# Altium PCB Top.PcbDoc
Units mil, origin at the board's own origin, x right, y up, seen from the top; angles counter-clockwise.
Board outline 1480.27 x 1340.03 mil, 2 copper layers (Top Layer, Bottom Layer); 4 components, 0 nets, 4 pads, 0 vias.
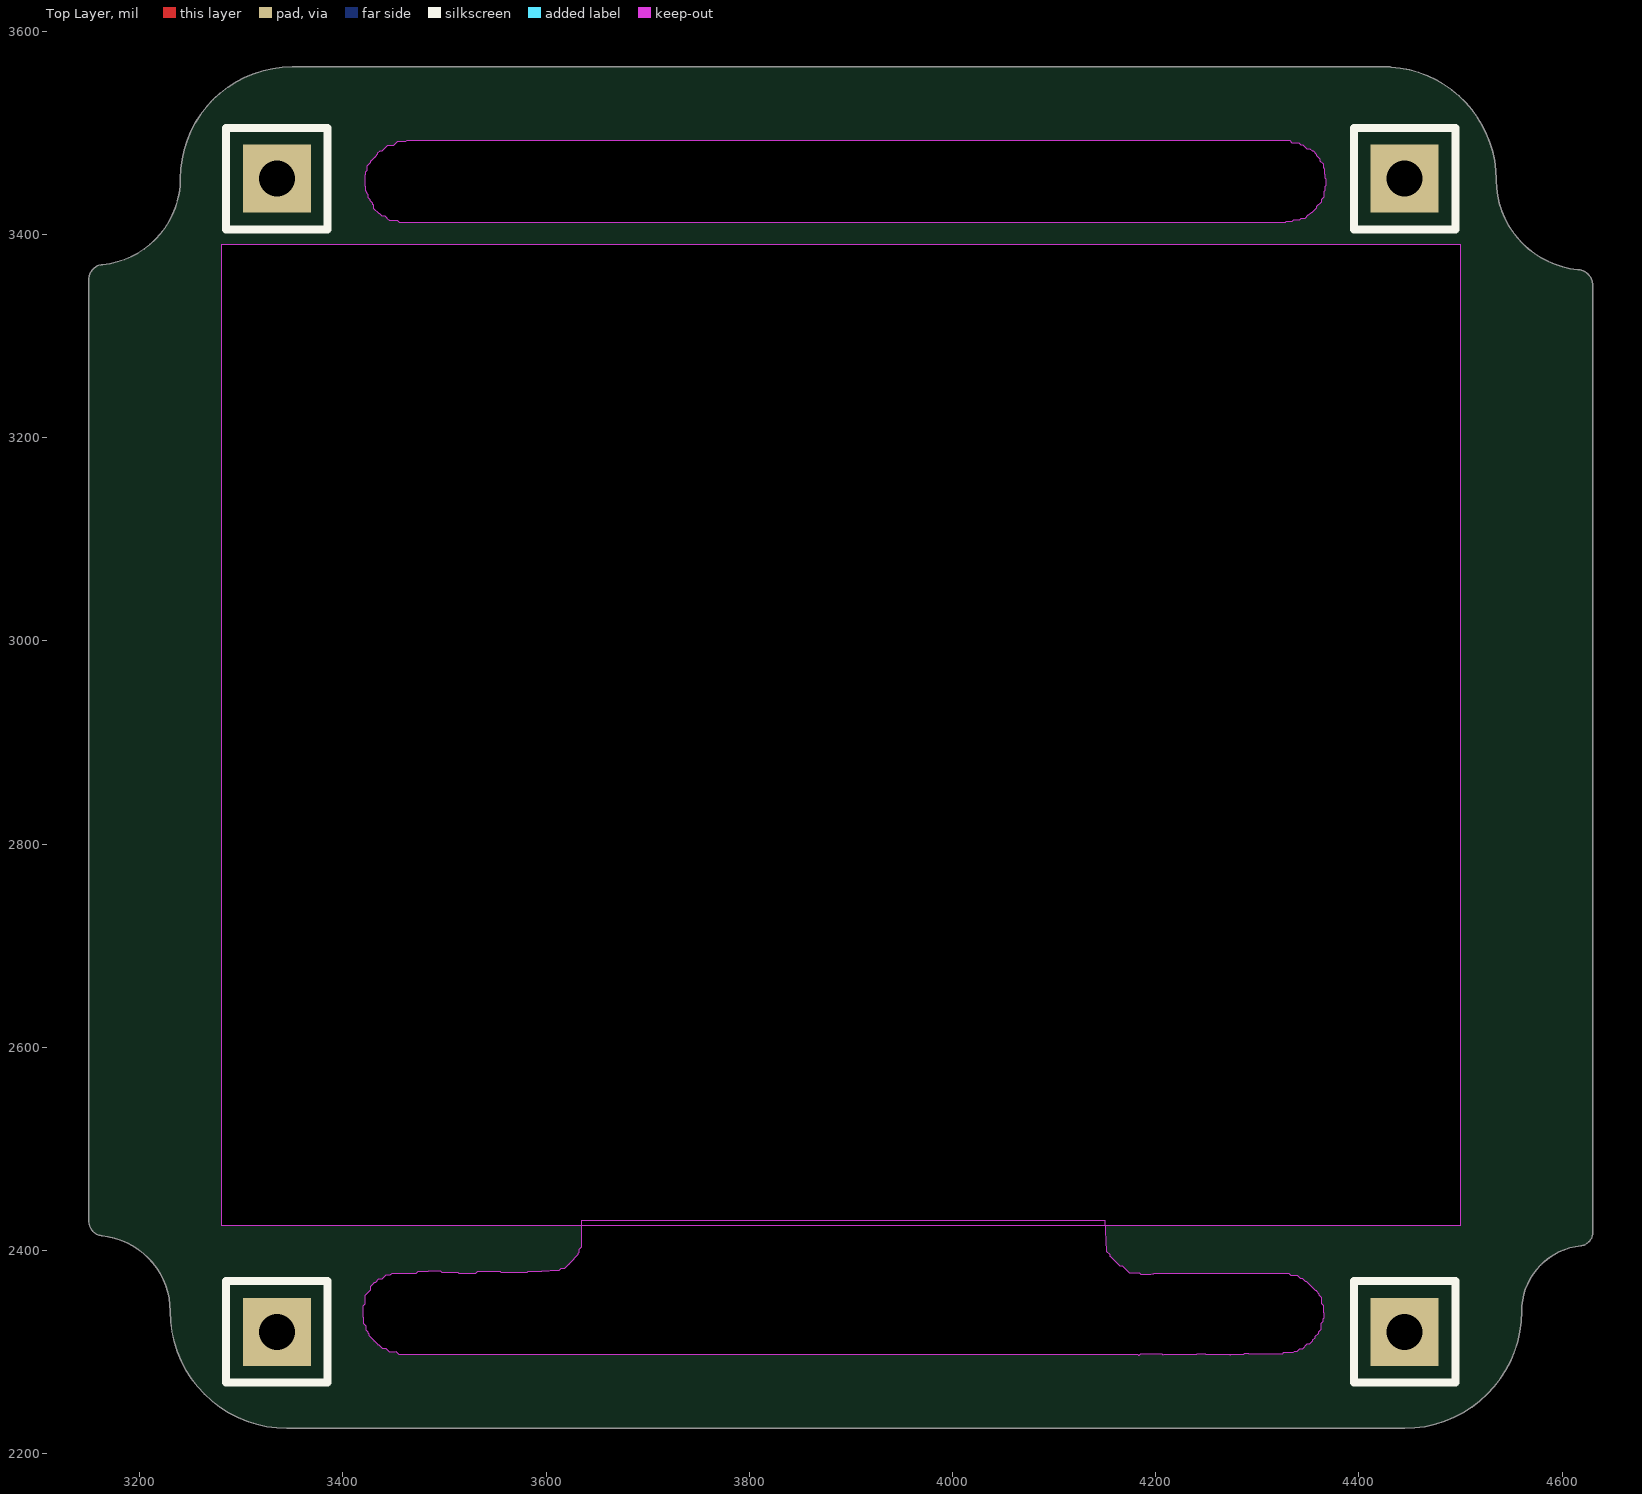
[diagram p0: Top Layer view]
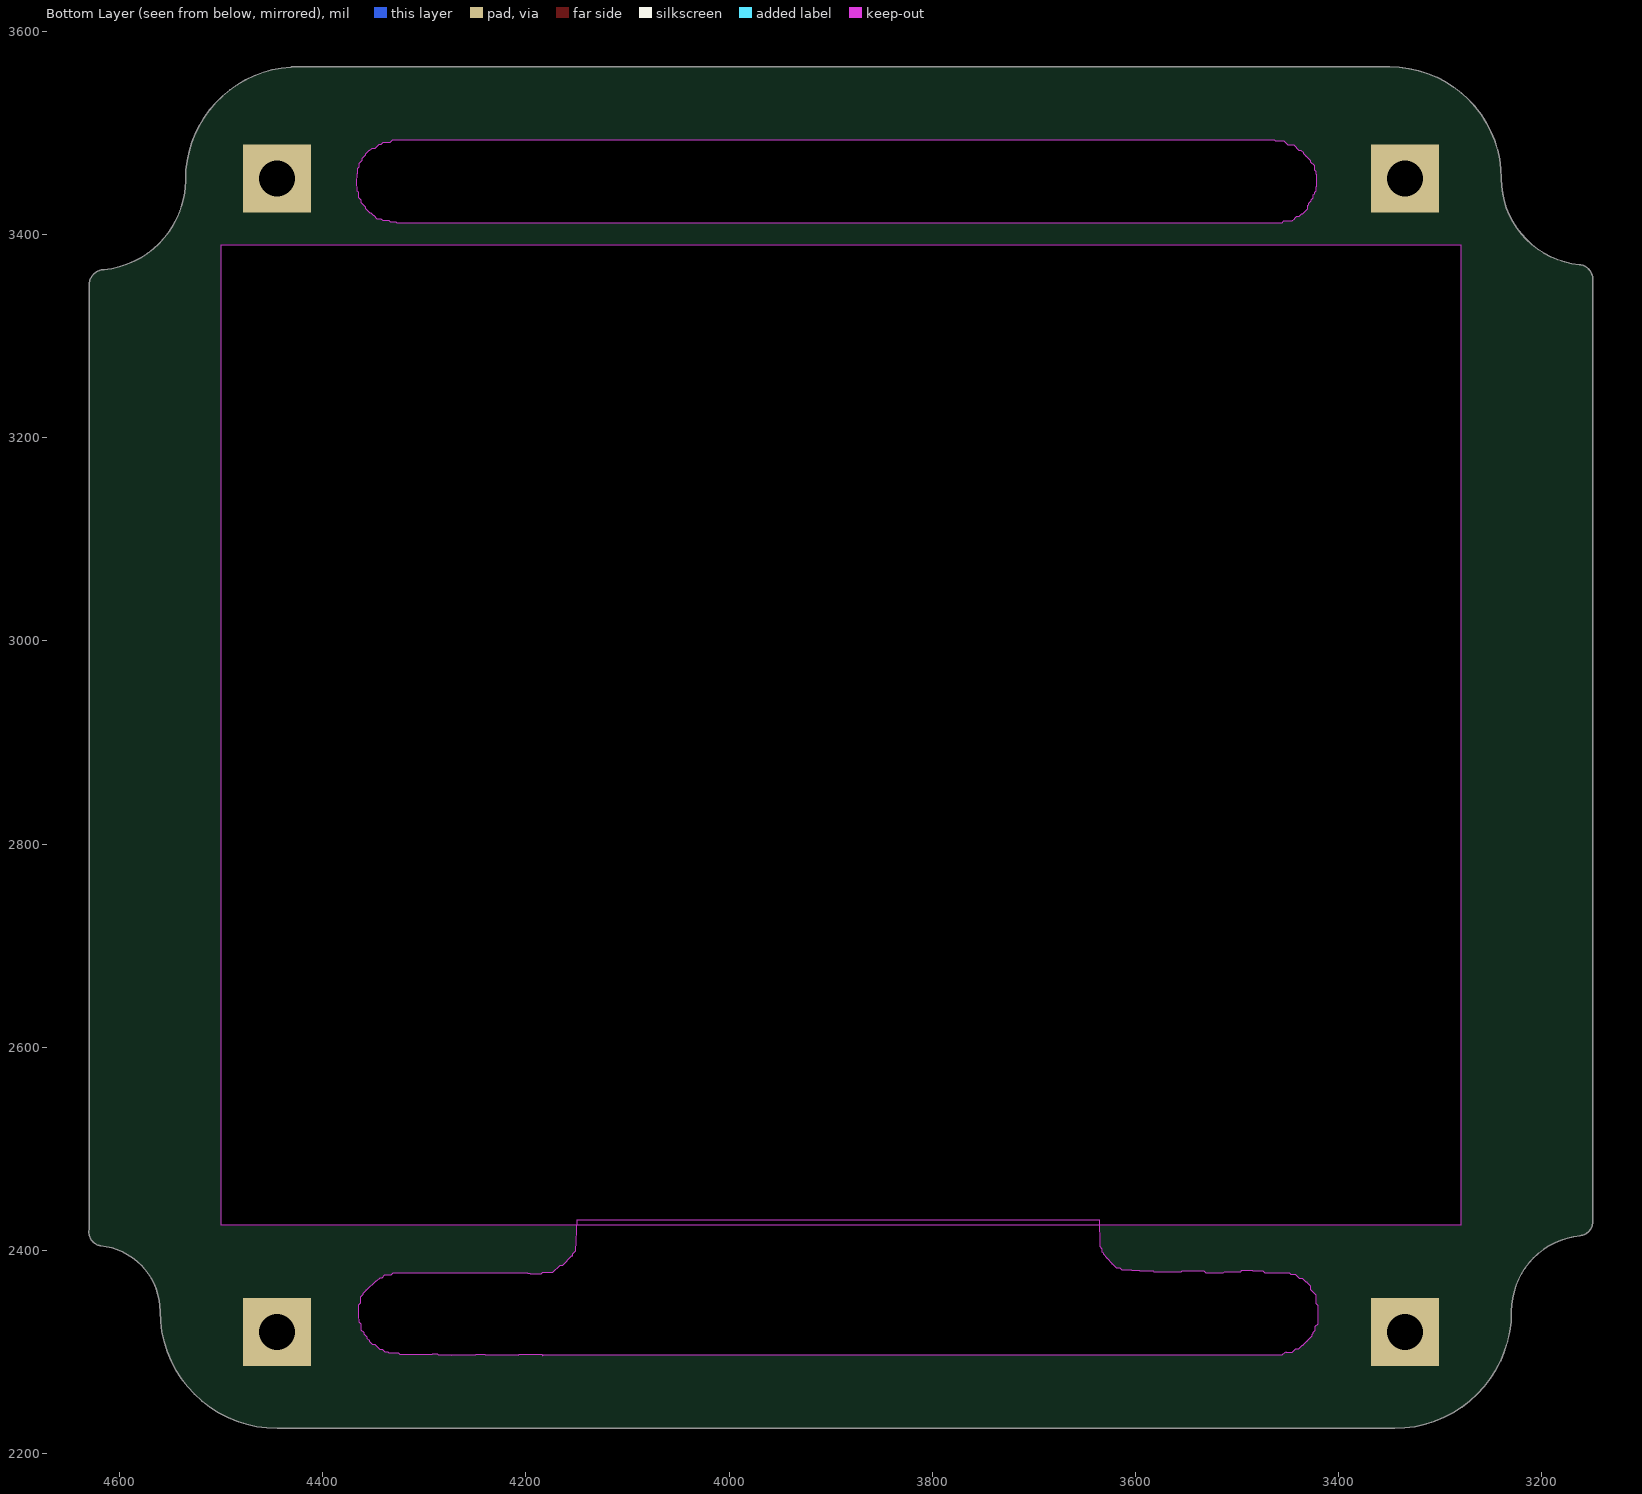
[diagram p1: Bottom Layer view, seen from below]

## Layer stack, top to bottom
Top Solder: solder mask 0.4, Solder Resist, Dk 3.5
Top Layer: signal copper 1.4
Dielectric 1: dielectric 12.6, FR-4, Dk 4.8
Bottom Layer: signal copper 1.4
Bottom Solder: solder mask 0.4, Solder Resist, Dk 3.5

## Board outline
3229.98,2340 cw(c3235,2340) 3229.99,2340.04 ccw(c3155,2340) 3162.42,2414.62 cw(c3162.84,2419.61) 3162.15,2414.65 cw(c3164.11,2428.73) 3149.99,2430.31 3149.99,3354.81 cw(c3164.63,3355.81) 3163.4,3370.43 ccw(c3155,3455) 3239.99,3455 cw(c3350,3455) 3350,3565.02 4430,3565.02 cw(c4430,3560) 4431.54,3564.77 cw(c4424.17,3454.17) 4535.02,3454.17 cw(c4424.17,3454.17) 4535.02,3453.34 ccw(c4624.17,3454.17) 4615.25,3365.46 cw(c4614.75,3350.2) 4630.02,3350.2 cw(c4614.75,3350.2) 4630.02,3349.96 cw(c4614.75,3350.2) 4630.01,3349.9 4630.02,3350 4630.02,2420.45 cw(c4616.4,2418.26) 4630.19,2418.26 cw(c4616.4,2418.26) 4619.13,2404.75 cw(c4618.14,2409.66) 4618.56,2404.66 cw(c4625,2340) 4618.63,2404.67 4618.56,2404.66 ccw(c4625,2340) 4560.02,2340 cw(c4445,2340) 4445,2224.98 3345,2224.98 cw(c3345,2230) 3344.92,2224.99 ccw(c3345,2340) 3345,2224.99 3344.92,2224.99 cw(c3345,2340)
cut-out: 3280,3390 3280,2425 4500,2425 4500,3390
cut-out: 3635,2430 4150,2430 4151.34,2399.41 4154.65,2396.1 4154.65,2394.13 4155.43,2394.13 4164.49,2385.08 4166.85,2385.08 4173.94,2377.99 4183.78,2377.99 4185.35,2376.42 4195.2,2376.42 4195.98,2377.2 4197.95,2377.2 4198.35,2377.6 4331.02,2377.6 4332.99,2375.63 4339.29,2375.63 4342.05,2372.87 4344.02,2372.87 4347.17,2369.72 4347.95,2369.72 4357.01,2360.67 4357.8,2360.67 4357.8,2360.28 4360.55,2357.52 4360.55,2356.34 4362.91,2353.98 4362.91,2348.07 4364.88,2346.1 4364.88,2339.02 4365.28,2338.62 4365.28,2333.11 4364.49,2332.32 4364.49,2329.96 4362.52,2327.99 4362.52,2322.09 4359.76,2319.33 4359.76,2318.15 4356.61,2315 4356.61,2313.82 4354.25,2311.46 4354.25,2310.67 4351.1,2307.52 4348.74,2307.52 4344.02,2302.8 4341.26,2302.8 4338.9,2300.43 4336.14,2300.43 4334.96,2299.25 4325.51,2299.25 4324.33,2298.07 4292.05,2298.07 4291.65,2298.46 4287.32,2298.46 4286.14,2297.28 4273.94,2297.28 4273.54,2296.89 4273.15,2297.28 4249.53,2297.28 4249.13,2297.68 4240.47,2297.68 4240.08,2297.28 4207.8,2297.28 4207.4,2296.89 4206.61,2297.68 4184.57,2297.68 4183.39,2296.5 4182.6,2297.28 3455.43,2297.28 3452.28,2300.43 3451.5,2299.65 3445.98,2299.65 3442.44,2303.19 3439.29,2303.19 3435.75,2306.73 3434.96,2306.73 3434.96,2307.13 3431.42,2310.67 3431.02,2310.67 3431.02,2311.06 3425.91,2316.18 3425.91,2317.76 3425.12,2318.54 3425.12,2319.33 3423.15,2321.3 3423.15,2325.24 3420.39,2327.99 3420.39,2333.9 3420,2334.29 3420,2345.71 3421.97,2347.68 3421.97,2355.94 3427.48,2361.46 3427.48,2364.61 3431.02,2368.15 3431.02,2368.94 3432.2,2368.94 3435.35,2372.09 3438.5,2372.09 3442.44,2376.02 3446.77,2376.02 3448.35,2377.6 3472.36,2377.6 3474.33,2379.57 3484.17,2379.57 3484.57,2379.96 3495.98,2379.96 3497.17,2378.78 3512.91,2378.78 3514.09,2377.6 3530.63,2377.6 3532.6,2379.57 3554.65,2379.57 3555.43,2378.78 3581.42,2378.78 3582.2,2379.57 3595.59,2379.57 3595.98,2379.96 3603.07,2379.96 3603.86,2380.75 3612.91,2380.75 3614.88,2382.72 3618.43,2382.72 3622.36,2386.65 3622.76,2386.65 3622.76,2387.05 3627.48,2391.77 3627.87,2391.77 3627.87,2392.56 3631.42,2396.1 3631.42,2397.28 3632.6,2398.46 3632.6,2401.22 3634.96,2403.58 3634.96,2406.34
cut-out: 3423.86,3467.72 3427.4,3471.26 3427.4,3472.44 3427.8,3472.44 3431.73,3476.38 3432.13,3476.38 3432.13,3477.17 3434.49,3479.53 3434.49,3480.31 3436.85,3482.68 3438.82,3482.68 3443.94,3487.8 3449.84,3487.8 3453.78,3491.73 3462.05,3491.73 3463.23,3492.91 4331.73,3492.91 4334.09,3490.55 4340.79,3490.55 4342.76,3488.58 4344.72,3488.58 4348.66,3484.65 4351.81,3484.65 4354.17,3482.28 4354.96,3482.28 4358.11,3479.13 4358.11,3477.95 4361.65,3474.41 4361.65,3472.83 4364.8,3469.68 4364.8,3466.14 4365.98,3464.96 4365.98,3459.84 4366.38,3459.45 4366.38,3455.91 4367.17,3455.12 4367.17,3448.03 4366.38,3447.24 4366.38,3443.31 4365.2,3442.13 4365.2,3436.61 4362.83,3434.25 4362.83,3431.89 4358.11,3427.17 4358.11,3425.98 4353.78,3421.65 4352.99,3421.65 4350.24,3418.9 4349.84,3418.9 4346.69,3415.75 4342.76,3415.75 4341.18,3414.17 4335.28,3414.17 4333.7,3412.6 4328.19,3412.6 4327.4,3411.81 3455.75,3411.81 3454.17,3413.39 3445.91,3413.39 3443.54,3415.75 3443.54,3416.14 3441.57,3418.11 3438.82,3418.11 3436.46,3420.47 3435.67,3420.47 3430.55,3425.59 3430.55,3428.74 3429.76,3429.53 3429.37,3429.53 3429.37,3430.71 3427.01,3433.07 3427.01,3434.25 3425.04,3436.22 3425.04,3438.98 3423.86,3440.16 3423.86,3440.55 3423.46,3440.94 3423.46,3441.73 3422.28,3442.91 3422.28,3447.24 3421.89,3447.64 3421.89,3459.06 3422.28,3459.45 3422.28,3461.81 3423.86,3463.39

## Design rules (kind name [scope] priority, off if disabled: settings)
Clearance [All] p1: gap=10
PolygonConnect [All] p1: connectstyle=Relief reliefconductorwidth=10 reliefentries=4 polygonreliefangle="90 Angle" airgapwidth=10
RoutingVias [All] p1: holewidth=28 width=50 viastyle="Through Hole" minholewidth=28 minwidth=50 maxholewidth=28 maxwidth=50
SolderMaskExpansion [All] p1: expansion=4
Width [All] p1: maxlimit=10 minlimit=10 preferedwidth=10
29 further rules are at their usual default settings.

## Components (designator, comment, footprint, x,y, rotation, side; value= is the part's Value field where it differs from the comment)
JP1 "HDR-1X1" HDR-1X1 4445,2320 r0 top
JP2 "HDR-1X1" HDR-1X1 3335,2320 r0 top
JP3 "HDR-1X1" HDR-1X1 4445,3455 r0 top
JP4 "HDR-1X1" HDR-1X1 3335,3455 r0 top

## Footprints (in the part's own frame and the unit in brackets; to place one, negate y for a bottom-side part, rotate by r counter-clockwise, add the part's x,y. Pads: shape width x height; smd on the part's side, far side on the other; paste and mask are expansions set on the pad)
HDR-1X1 [mm] "排针，1脚"
  rect 1.7x1.7 hole 0.9: 1(0,0)
  silkscreen extent -1.27,-1.27 1.27,1.27, body extent -1.27,-1.27 1.27,1.27, height 8.5

## Part data
JP1 JP2 JP3 JP4: library part "Header 1", "1P接插件"

## Nets (pads, with @x,y where several pads share a name; then routed paths per layer and width w, separated by ;. In a path a pad name is that pad's centre, name@x,y a point inside that pad or via, vN(x,y) a via of type N, cw(c..) or ccw(c..) an arc to the next point about the centre after c; other vN are vias at no path point)
pads on no net: JP1.1 JP2.1 JP3.1 JP4.1

## Silkscreen, mask and mechanical layers (free items; w line width, h text height)
Mechanical 1:
  lines w3.94: 3461.65,3412.39 cw(c3461.65,3451.76) 3461.65,3491.13 ; 3636.54,2414.3 cw(c3597.26,2416.97) 3597.26,2377.6 3459.37,2377.6 ccw(c3459.37,2338.23) 3459.37,2298.86 4325.51,2298.86 ccw(c4325.51,2338.23) 4325.51,2377.6 4187.63,2377.6 cw(c4187.63,2416.97) 4148.35,2414.3 ; 4327.79,3412.39 ccw(c4327.79,3451.76) 4327.79,3491.13
  lines w4: 3461.65,3412.39 4327.98,3412.39 ; 3465.01,3491.13 4327.79,3491.13 ; 3634.96,2406.34 3634.96,2424.96 ; 4148.35,2414.3 4148.35,2423.35
  lines w10: 3345,2230 cw(c3345,2340) 3235,2340 ccw(c3155,2340) 3162.84,2419.61 cw(c3164.11,2428.73) 3155,2430 3155,3355 cw(c3164.63,3355.81) 3163.82,3365.43 ccw(c3155,3455) 3245,3455 cw(c3350,3455) 3350,3560 4430,3560 ; 3350.31,2230 4445,2230 ccw(c4445,2340) 4555,2340 cw(c4625,2340) 4618.14,2409.66 ccw(c4616.4,2418.26) 4625,2420 4625,3350 ccw(c4614.75,3350.2) 4614.94,3360.45 cw(c4624.17,3454.17) 4530,3453.35 ccw(c4424.17,3454.17) 4425,3560 ; 4148.35,2423.35 4150,2425 ; 4495,3390 3280,3390 3280,2425 4500,2425 ; 4500,2430 4500,3385